# Altium PCB UmbilicalBoardV5.PcbDoc
Units mm, origin at the board's own origin, x right, y up, seen from the top; angles counter-clockwise.
Board outline 88.77 x 92.99 mm, 4 copper layers (Top Layer, GndPlane, PowerPlane, Bottom Layer), stack 0.107 mm thick; 60 components, 102 nets, 404 pads, 5 vias.
Unrouted connection lines stored in the file: 136.
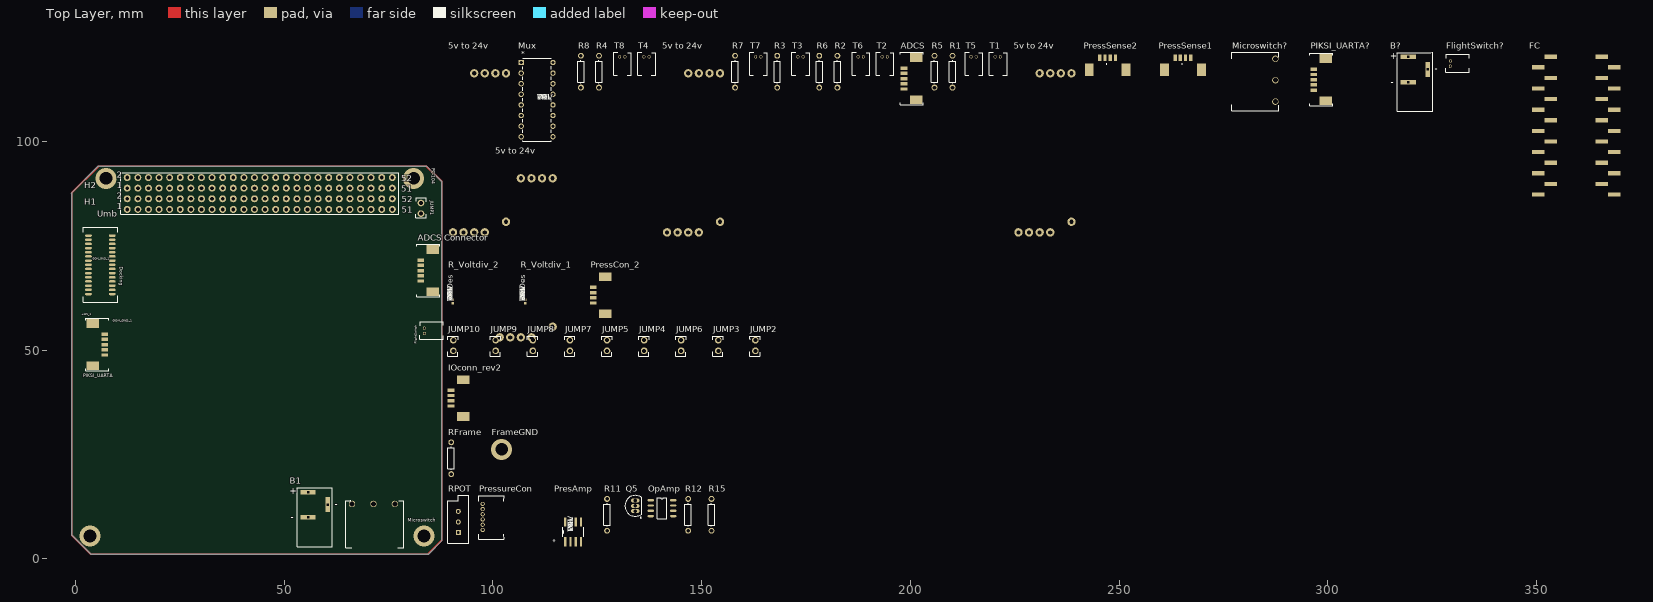
[diagram p0: Top Layer view]
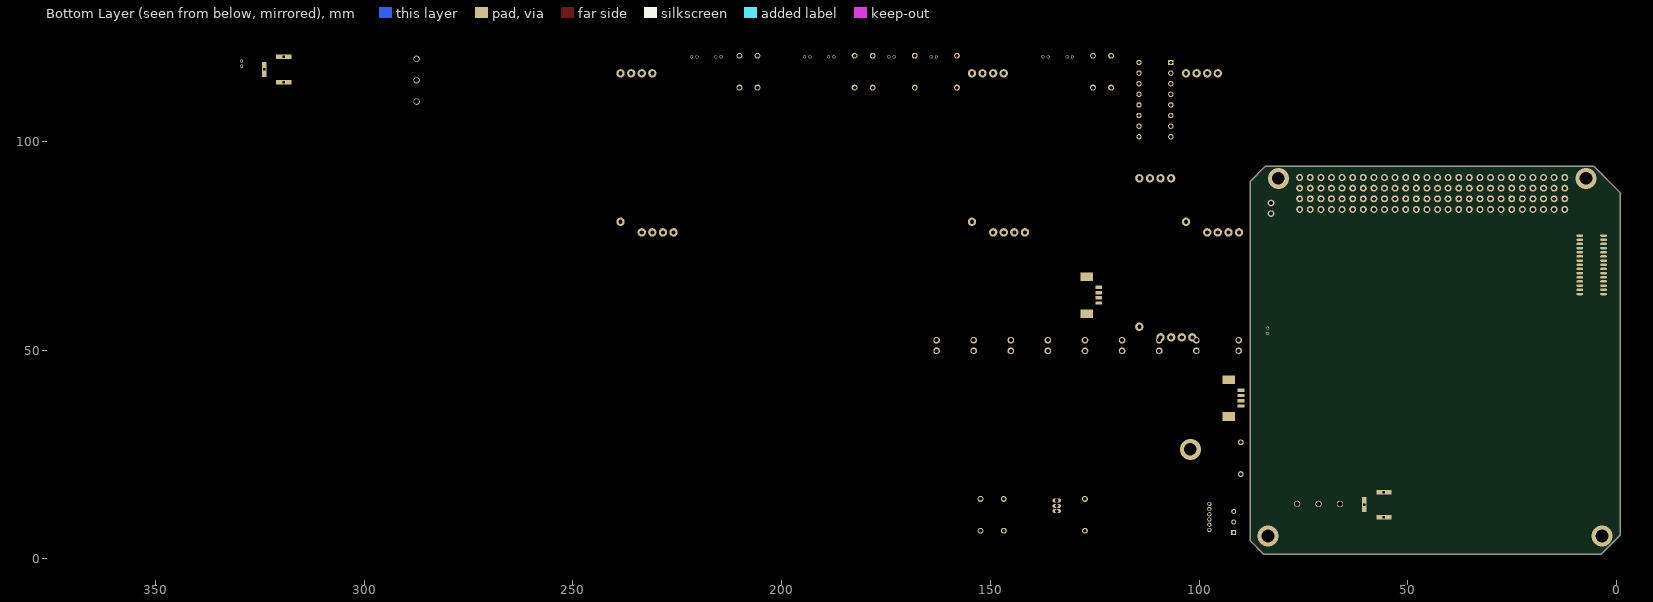
[diagram p1: Bottom Layer view, seen from below]
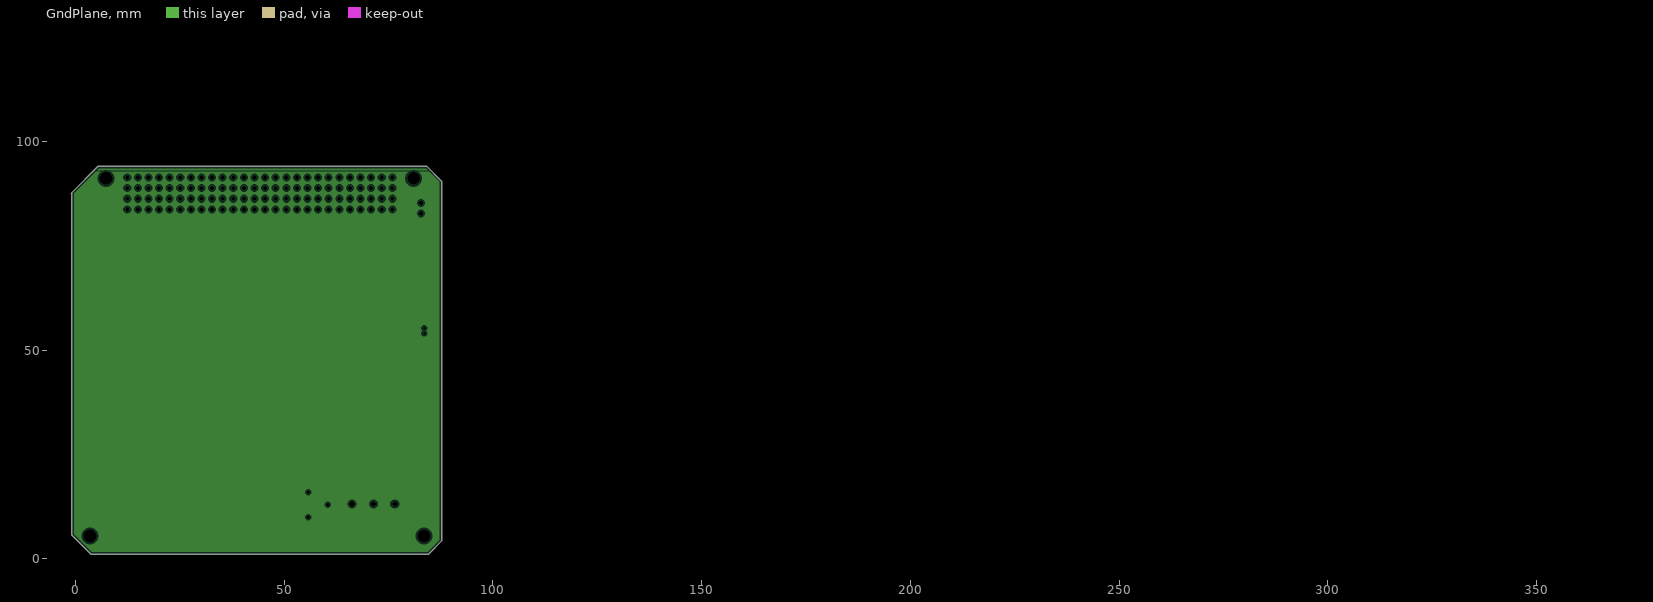
[diagram p2: GndPlane, clearances drawn from the general rule]
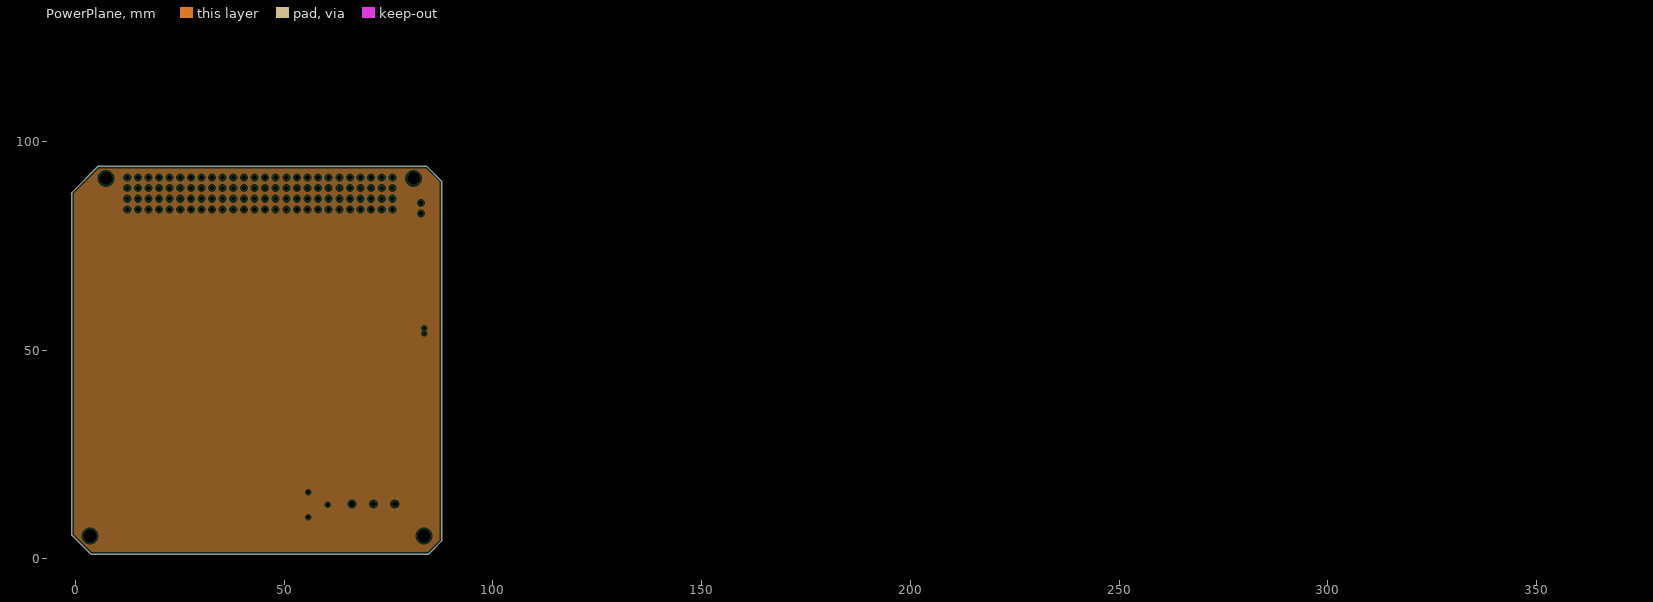
[diagram p3: PowerPlane, clearances drawn from the general rule]

## Layer stack, top to bottom
Top Solder: solder mask 0.0102, Solder Resist, Dk 3.5
Top Layer: signal copper 0.0356
GndPlane: plane copper 0.0178
PowerPlane: plane copper 0.0178, net +12V_1_JUMP7
Bottom Layer: signal copper 0.0356
Bottom Solder: solder mask 0.0102, Solder Resist, Dk 3.5

## Board outline
84.099,94.132 87.782,90.449 87.782,4.42 87.808,4.394 84.633,1.219 84.633,1.143 3.708,1.143 -0.889,5.74 -0.889,87.579 -0.965,87.655 5.436,94.056 84.099,94.056

## Design rules (kind name [scope] priority, off if disabled: settings)
Clearance [All] p1: gap=0.254 ignorepadtopadclearanceinfootprint=FALSE except(0: Arc-Hole Track-Hole SMDPad-Hole THPad-Hole Via-Hole Fill-Hole Poly-Hole Region-Hole Text-Hole; 0.127: Track-Track Track-SMDPad Track-THPad SMDPad-SMDPad SMDPad-THPad THPad-THPad)
HoleSize [All] p1: absolutevalues=TRUE maxlimit=3.048 minlimit=0.025 maxpercent=80.000 minpercent=20.000
MinimumSolderMaskSliver [All] p1: minsoldermaskwidth=0.127
PlaneClearance [All] p1: clearance=0.508
PlaneConnect [All] p1: planeconnectstyle=Direct reliefexpansion=0.508 reliefentries=4 reliefconductorwidth=0.254 reliefairgap=0.254
PolygonConnect [All] p1: connectstyle=Direct reliefconductorwidth=0.254 reliefentries=4 polygonreliefangle="90 Angle" airgapwidth=0.254
RoomDefinition U_GroundtoFrame [InComponentClass('U_GroundtoFrame')] p1: confinementstyle=ConfineIn formatcopy=TRUE lockcomponents=FALSE outline 88.951,19.253 111.836,19.253 111.836,31.547 88.951,31.547
RoomDefinition "U_24V Step Up Voltage Regulator U3V50F24" [InComponentClass('U_24V Step Up Voltage Regulator U3V50F24')] p2: confinementstyle=ConfineIn formatcopy=TRUE lockcomponents=FALSE outline 88.951,72.949 240.106,72.949 240.106,124.155 88.951,124.155
RoomDefinition PressureSensor [InComponentClass('PressureSensor')] p3: confinementstyle=ConfineIn formatcopy=TRUE lockcomponents=FALSE outline 88.951,2.565 155.905,2.565 155.905,17.983 88.951,17.983
RoomDefinition U_ADCS [InComponentClass('U_ADCS')] p4: confinementstyle=ConfineIn formatcopy=TRUE lockcomponents=FALSE outline 81.28,62.128 87.859,62.128 87.859,76.098 81.28,76.098
RoutingVias [All] p1: holewidth=0.711 width=1.27 viastyle="Through Hole" minholewidth=0.711 minwidth=1.27 maxholewidth=0.711 maxwidth=1.27
SilkToSolderMaskClearance [IsPad] p1: minsilkscreentomaskgap=0.05 clearancetoexposedcopper=TRUE
SolderMaskExpansion [All] p1: expansion=0.102
Width [All] p1: maxlimit=0.559 minlimit=0.305 preferedwidth=0.33
25 further rules are at their usual default settings.

## Classes and differential pairs
component class PressureSensor: OpAmp PresAmp PressureCon Q5 R11 R12 R15 RPOT
component class U_IOconnector: IOconn_rev2
component class Docking: Docking
component class Switch: FlightSwitch Microswitch
component class Umbilical104: "5v to 24v" ADCS B? FC FlightSwitch? Microswitch? Mux PC-104 PIKSI_UARTA? PressSense1 PressSense2 R1 R2 R3 R4 R5 R6 R7 R8 T1 T2 T3 T4 T5 T6 T7 T8
component class U_Jumpers_rev2: JUMP1 JUMP2 JUMP3 JUMP4 JUMP5 JUMP6 JUMP7 JUMP8 JUMP9 JUMP10
component class U_PressureConnector_2: PressCon_2 R_Voltdiv_1 R_Voltdiv_2
component class "Barrel Jack": B1
component class "U_24V Step Up Voltage Regulator U3V50F24": "5v to 24v"
component class U_ADCS: "ADCS Connector"
component class U_GroundtoFrame: FrameGND RFrame
component class PIKSI_UARTA: PIKSI_UARTA

## Components (designator, comment, footprint, x,y, rotation, side; value= is the part's Value field where it differs from the comment)
"5v to 24v" "U3V50F24, 24V Step Up Regulator, Pololu" U3V50F24 225.907,78.232 r90 top
"5v to 24v" "U3V50F24, 24V Step Up Regulator, Pololu" U3V50F24 141.732,78.232 r90 top
"5v to 24v" "U3V50F24, 24V Step Up Regulator, Pololu" U3V50F24 90.449,78.232 r90 top
"5v to 24v" "U3V50F24, 24V Step Up Regulator, Pololu" U3V50F24 101.625,53.086 r90 top
ADCS "ADCS" "Molex Picoblade 5 Pin" 202.895,108.966 r90 top
"ADCS Connector" "PIKSI_UART Connector" "Molex Picoblade 5 Pin" 87.128,62.968 r90 top
B1 "Barrel_Jack" Barrel_Jack 55.753,9.957 r0 top
B? "Barrel_Jack" Barrel_Jack 319.278,114.224 r0 top
Docking "Docking_Molex_30Pin" DOCKING_MOLEX_30PIN 3.124,77.47 r270 top
FC "Teensy 3.2 Headers" "Teensy 3.2 SMD Headers" 350.418,120.32 r0 top
FlightSwitch "RemoverBeforeFlightSwitch" "REMOVERBEFOREFLIGHT SWITCH" 83.591,52.07 r90 top
FlightSwitch? "RemoverBeforeFlightSwitch" "RemoverBeforeFlight Switch" 329.362,116.078 r90 top
FrameGND "ViatoFrame" ViatoFrame 102.108,26.263 r90 top
IOconn_rev2 "IOconn_rev2" IOConn_Rev2 89.992,36.652 r90 top
JUMP1 "Jumper(DIP2)" JUMPER(DIP2) 82.779,85.268 r270 top
JUMP2 "Jumper(DIP2)" Jumper(DIP2) 162.89,49.86 r90 top
JUMP3 "Jumper(DIP2)" Jumper(DIP2) 154,49.86 r90 top
JUMP4 "Jumper(DIP2)" Jumper(DIP2) 136.245,49.86 r90 top
JUMP5 "Jumper(DIP2)" Jumper(DIP2) 127.355,49.86 r90 top
JUMP6 "Jumper(DIP2)" Jumper(DIP2) 145.11,49.86 r90 top
JUMP7 "Jumper(DIP2)" Jumper(DIP2) 118.465,49.86 r90 top
JUMP8 "Jumper(DIP2)" Jumper(DIP2) 109.575,49.86 r90 top
JUMP9 "Jumper(DIP2)" Jumper(DIP2) 100.685,49.86 r90 top
JUMP10 "Jumper(DIP2)" Jumper(DIP2) 90.525,49.86 r90 top
Microswitch "MicroSwitch" MICROSWITCH_3PIN 71.45,13.233 r180 top locked
Microswitch? "MicroSwitch" MicroSwitch_3pin 287.502,114.63 r90 top
Mux "CD74HC4051E" N16 114.401,101.143 r0 top value=Value
OpAmp "UA741" UA741 137.82,14.071 r0 top
PC-104 "PC-104" PC-104FOOTPRINT 12.421,83.744 r0 top locked
PIKSI_UARTA "PIKSI_UART Connector" "MOLEX PICOBLADE 5 PIN" 2.642,57.455 r270 top
PIKSI_UARTA? "PIKSI_UART Connector" "Molex Picoblade 5 Pin" 301.015,108.712 r90 top
PresAmp "AD627ARZ" R_8 119.227,6.477 r90 top value=Value
PressCon_2 "PressureConn_2" PressCon_2 124.714,60.63 r90 top
PressSense1 "Connector 4POS Molex PicoBlade" 532610471 267.182,120.066 r90 top
PressSense2 "Connector 4POS Molex PicoBlade" 532610471 249.148,120.066 r90 top
PressureCon "PressureConnector" "Pressure Connector" 96.367,9.83 r90 top
Q5 "2N3906" TO-92A 134.112,12.725 r0 top
R1 "Resistor" AXIAL-0.3 210.109,116.738 r90 top value=1K
R2 "Resistor" AXIAL-0.3 182.55,116.738 r90 top value=1K
R3 "Resistor" AXIAL-0.3 168.122,116.738 r90 top value=1K
R4 "Resistor" AXIAL-0.3 125.425,116.738 r90 top value=1K
R5 "Resistor" AXIAL-0.3 205.791,116.738 r90 top value=1K
R6 "Resistor" AXIAL-0.3 178.206,116.738 r90 top value=1K
R7 "Resistor" AXIAL-0.3 158.013,116.738 r90 top value=1K
R8 "Resistor" AXIAL-0.3 121.107,116.738 r90 top value=1K
R11 "1000" AXIAL-0.3 127.355,10.566 r90 top value=Res
R12 "1000" AXIAL-0.3 146.786,10.566 r90 top value=Res
R15 "1000" AXIAL-0.3 152.374,10.566 r90 top value=Res
R_Voltdiv_1 "3K" 0402 107.721,61.696 r90 top value=3000
R_Voltdiv_2 "1090" 0402 90.424,61.696 r90 top
RFrame "Rframe" AXIAL-0.3 90.017,24.13 r90 top value=1M
RPOT "100K" VR5 91.719,8.864 r90 top value=1K
T1 "TempSensor1" "RemoverBeforeFlight Switch" 218.389,120.294 r0 top
T2 "TempSensor2" "RemoverBeforeFlight Switch" 191.313,120.294 r0 top
T3 "TempSensor3" "RemoverBeforeFlight Switch" 171.12,120.294 r0 top
T4 "TempSensor4" "RemoverBeforeFlight Switch" 134.213,120.294 r0 top
T5 "TempSensor5" "RemoverBeforeFlight Switch" 212.598,120.294 r0 top
T6 "TempSensor6" "RemoverBeforeFlight Switch" 185.547,120.294 r0 top
T7 "TempSensor7" "RemoverBeforeFlight Switch" 161.01,120.294 r0 top
T8 "TempSensor8" "RemoverBeforeFlight Switch" 128.422,120.294 r0 top

## Footprints (in the part's own frame and the unit in brackets; to place one, negate y for a bottom-side part, rotate by r counter-clockwise, add the part's x,y. Pads: shape width x height; smd on the part's side, far side on the other; paste and mask are expansions set on the pad)
0402 [mil]
  rect 22x24 smd: 1(-16.5,0) 2(16.5,0)
532610471 [mm] "Connector 4POS Molex PicoBlade"
  rect 1.6x0.8 smd: 1(0,3.75) 2(0,2.5) 3(0,1.25) 4(0,0)
  rect 3x2.1 smd: ""(-2.9,6.3) ""(-2.9,-2.55)
  silkscreen extent -1.52,2.07 -1.42,2.17, body extent -4.71,-3.81 1.02,7.56, height 0.6
AXIAL-0.3 [mm] "Axial Device, Thru-Hole; 2 Leads; 0.3 in Pin Spacing"
  round 1.4 hole 0.85: 1(-3.81,0) 2(3.81,0)
  silkscreen extent -2.77,-0.76 2.77,0.76
Barrel_Jack [mm] "KLDX-0202-B"
  rect 3.6x1.1 hole 0.5 square: 0(0,0) 2(0,6.05)
  rect 1.1x3.6 hole 0.5 square: 1(4.7,3.05)
  silkscreen extent -2.65,-7 5.82,7.12
DOCKING_MOLEX_30PIN [mm] "501571-3007"
  oval 0.6x1.6 smd: A1(0,0) A2(1,0) A3(2,0) A4(3,0) A5(4,0) A6(5,0) A7(6,0) A8(7,0) A9(8,0) A10(9,0) A11(10,0) A12(11,0) A13(12,0) A14(13,0) A15(14,0) A16(0,5.7) A17(1,5.7) A18(2,5.7) A19(3,5.7) A20(4,5.7) A21(5,5.7) A22(6,5.7) A23(7,5.7) A24(8,5.7) A25(9,5.7) A26(10,5.7) A27(11,5.7) A28(12,5.7) A29(13,5.7) A30(14,5.7)
  oval 0.6x1.6 smd far side: B1(0,0) B2(1,0) B3(2,0) B4(3,0) B5(4,0) B6(5,0) B7(6,0) B8(7,0) B9(8,0) B10(9,0) B11(10,0) B12(11,0) B13(12,0) B14(13,0) B15(14,0) B16(0,5.7) B17(1,5.7) B18(2,5.7) B19(3,5.7) B20(4,5.7) B21(5,5.7) B22(6,5.7) B23(7,5.7) B24(8,5.7) B25(9,5.7) B26(10,5.7) B27(11,5.7) B28(12,5.7) B29(13,5.7) B30(14,5.7)
  silkscreen extent -1.97,-1.3 16.02,7.02, body extent -1.97,-1.27 16.02,6.98, height 2.95
IOConn_Rev2 [mm] "Molex 4 Pin Picoblade. Part # 53261-0471"
  rect 0.8x1.6 all layers, no hole: 1(0,0) 2(1.25,0) 3(2.5,0) 4(3.75,0)
  rect 2.1x3 all layers, no hole: 5(-2.55,-2.9) 6(6.3,-2.9)
  body extent -3.22,-4.47 6.93,0.73, height 1.7
JUMPER(DIP2) [mm] "S1012E-02-ND (Pin), 3M9580-ND (Jumper)"
  round 1.6 hole 0.95: 1(0,0) 2(2.54,0)
  silkscreen extent -1.3,-1.2 3.55,1.3
Jumper(DIP2) [mm] "S1012E-02-ND (Pin), 3M9580-ND (Jumper)"
  round 1.6 hole 0.95: 1(0,0) 2(2.54,0)
  silkscreen extent -1.3,-1.2 3.55,1.3
MICROSWITCH_3PIN [mm] "Omron Electronics Inc-EMC Div D2FS-FL-N-A1"
  round 1.524 hole 1.2: 1(-5.08,0.05) 2(0.05,0.05) 3(5.18,0.05)
  silkscreen extent -7.25,-0.77 6.73,10.55, body extent -7.25,-0.75 6.73,10.55
MicroSwitch_3pin [mm] "Omron Electronics Inc-EMC Div D2FS-FL-N-A1"
  round 1.524 hole 1.2: 1(-5.08,0.05) 2(0.05,0.05) 3(5.18,0.05)
  silkscreen extent -7.25,-0.77 6.73,10.55, body extent -7.25,-0.75 6.73,10.55
"Molex Picoblade 5 Pin" [mm] "Molex Picoblade Header, SMT, Right Angle  53261-0571"
  rect 0.8x1.6 smd: 0(3.6,4.4) 1(4.85,4.4) 2(6.1,4.4) 3(7.35,4.4) 4(8.6,4.4)
  rect 2.1x3 smd: 5(1.05,1.5) 6(11.15,1.5)
  silkscreen extent -0.2,-0.2 12.4,5.3, body extent 0.4,0 11.8,5.2, height 3.4
"MOLEX PICOBLADE 5 PIN" [mm] "Molex Picoblade Header, SMT, Right Angle  53261-0571"
  rect 0.8x1.6 smd: 0(3.6,4.4) 1(4.85,4.4) 2(6.1,4.4) 3(7.35,4.4) 4(8.6,4.4)
  rect 2.1x3 smd: 5(1.05,1.5) 6(11.15,1.5)
  silkscreen extent -0.2,-0.2 12.4,5.3, body extent 0.4,0 11.8,5.2, height 3.4
N16 [mil]
  rect 51x51 / inner round 60 / far side rect 51x51 hole 31: 1(-300,700)
  round 51 / inner round 60 / far side round 51 hole 31: 2(-300,600) 3(-300,500) 4(-300,400) 5(-300,300) 6(-300,200) 7(-300,100) 8(-300,0) 9(0,0) 10(0,100) 11(0,200) 12(0,300) 13(0,400) 14(0,500) 15(0,600) 16(0,700)
  silkscreen extent -285,-42 -15,742, body extent 0,0 10,10, height 10
PC-104FOOTPRINT [mm]
  round 1.676 hole 0.914 mask+0.076: H1_1(0,0) H1_2(0,2.54) H1_3(2.54,0) H1_4(2.54,2.54) H1_5(5.08,0) H1_6(5.08,2.54) H1_7(7.62,0) H1_8(7.62,2.54) H1_9(10.16,0) H1_10(10.16,2.54) H1_11(12.7,0) H1_12(12.7,2.54) H1_13(15.24,0) H1_14(15.24,2.54) H1_15(17.78,0) H1_16(17.78,2.54) H1_17(20.32,0) H1_18(20.32,2.54) H1_19(22.86,0) H1_20(22.86,2.54) H1_21(25.4,0) H1_22(25.4,2.54) H1_23(27.94,0) H1_24(27.94,2.54) H1_25(30.48,0) H1_26(30.48,2.54) H1_27(33.02,0) H1_28(33.02,2.54) H1_29(35.56,0) H1_30(35.56,2.54) H1_31(38.1,0) H1_32(38.1,2.54) H1_33(40.64,0) H1_34(40.64,2.54) H1_35(43.18,0) H1_36(43.18,2.54) H1_37(45.72,0) H1_38(45.72,2.54) H1_39(48.26,0) H1_40(48.26,2.54) H1_41(50.8,0) H1_42(50.8,2.54) H1_43(53.34,0) H1_44(53.34,2.54) H1_45(55.88,0) H1_46(55.88,2.54) H1_47(58.42,0) H1_48(58.42,2.54) H1_49(60.96,0) H1_50(60.96,2.54) H1_51(63.5,0) H1_52(63.5,2.54) H2_1(0,5.08) H2_2(0,7.62) H2_3(2.54,5.08) H2_4(2.54,7.62) H2_5(5.08,5.08) H2_6(5.08,7.62) H2_7(7.62,5.08) H2_8(7.62,7.62) H2_9(10.16,5.08) H2_10(10.16,7.62) H2_11(12.7,5.08) H2_12(12.7,7.62) H2_13(15.24,5.08) H2_14(15.24,7.62) H2_15(17.78,5.08) H2_16(17.78,7.62) H2_17(20.32,5.08) H2_18(20.32,7.62) H2_19(22.86,5.08) H2_20(22.86,7.62) H2_21(25.4,5.08) H2_22(25.4,7.62) H2_23(27.94,5.08) H2_24(27.94,7.62) H2_25(30.48,5.08) H2_26(30.48,7.62) H2_27(33.02,5.08) H2_28(33.02,7.62) H2_29(35.56,5.08) H2_30(35.56,7.62) H2_31(38.1,5.08) H2_32(38.1,7.62) H2_33(40.64,5.08) H2_34(40.64,7.62) H2_35(43.18,5.08) H2_36(43.18,7.62) H2_37(45.72,5.08) H2_38(45.72,7.62) H2_39(48.26,5.08) H2_40(48.26,7.62) H2_41(50.8,5.08) H2_42(50.8,7.62) H2_43(53.34,5.08) H2_44(53.34,7.62) H2_45(55.88,5.08) H2_46(55.88,7.62) H2_47(58.42,5.08) H2_48(58.42,7.62) H2_49(60.96,5.08) H2_50(60.96,7.62) H2_51(63.5,5.08) H2_52(63.5,7.62)
  silkscreen extent -1.5,-1.19 65,8.81
PressCon_2 [mm] "Molex Picoblade 4 pin (for the second pressure conn) Part # 53261-0471"
  rect 0.8x1.6 all layers, no hole: 1(0.675,0.65) 2(1.925,0.65) 3(3.175,0.65) 4(4.425,0.65)
  rect 2.1x3 all layers, no hole: 5(-1.875,-2.25) 6(6.975,-2.25)
  body extent -2.55,-3.82 7.6,1.38, height 1.7
"Pressure Connector" [mm] "53048-0610"
  round 1 hole 0.6 mask+0.076: 1(-2.875,-1.2) 2(-1.625,-1.2) 3(-0.375,-1.2) 4(0.875,-1.2) 5(2.125,-1.2) 6(3.375,-1.2)
  silkscreen extent -5.07,-6.32 5.35,-0.23, body extent -4.45,-6.08 4.8,-0.58, height 1.75
R_8 [mil]
  rect 86x22 smd: 1(-93,75) 2(-93,25) 3(-93,-25) 4(-93,-75) 5(93,-75) 6(93,-25) 7(93,25) 8(93,75)
  silkscreen extent -46,-98 46,98
"REMOVERBEFOREFLIGHT SWITCH" [mm] "Molex Picoblade Part Number: 53048-0210"
  round 0.75 hole 0.5: 1(1.95,0) 2(3.205,0)
  silkscreen extent 0.53,-4.5 4.78,1.05, body extent 0.53,-4.47 4.78,1.03, height 4.05
"RemoverBeforeFlight Switch" [mm] "Molex Picoblade Part Number: 53048-0210"
  round 0.75 hole 0.5: 1(1.95,0) 2(3.205,0)
  silkscreen extent 0.53,-4.5 4.78,1.05, body extent 0.53,-4.47 4.78,1.03, height 4.05
"Teensy 3.2 SMD Headers" [mm]
  rect 3x1 smd: 1(3,0) 2(0,-2.54) 3(3,-5.08) 4(0,-7.62) 5(3,-10.16) 6(0,-12.7) 7(3,-15.24) 8(0,-17.78) 9(3,-20.32) 10(0,-22.86) 11(3,-25.4) 12(0,-27.94) 13(3,-30.48) 14(0,-33.02) 20(18.24,-33.02) 21(15.24,-30.48) 22(18.24,-27.94) 23(15.24,-25.4) 24(18.24,-22.86) 25(15.24,-20.32) 26(18.24,-17.78) 27(15.24,-15.24) 28(18.24,-12.7) 29(15.24,-10.16) 30(18.24,-7.62) 31(15.24,-5.08) 32(18.24,-2.54) 33(15.24,0)
  body extent -1.09,-34.49 19.35,1.16, height 0.25
TO-92A [mm] "TO, Flat Index; 3 In-Line, Axial Leads; Body Dia. 4.5mm; Leads 0.51 x 0.48 mm (max)"
  oval 2x1 hole 0.9: 1(0,-1.27) 2(0,0) 3(0,1.27)
  silkscreen extent -2.48,-2.95 1.5,2.48, body extent -2.48,-2.5 1.5,2.5, height 6.86
U3V50F24 [mm]
  round 2 hole 1: 1(0,0) 2(0,-2.54) 3(0,-5.08) 4(0,-7.62) 5(2.54,-12.7) 6(38.1,-12.7) 7(38.1,-10.16) 8(38.1,-7.62) 9(38.1,-5.08)
  body extent -4.72,-14 42.7,1.27, height 0.25
UA741 [mm]
  oval 1.5x0.55 smd: 1(0,0) 2(0,-1.27) 3(0,-2.54) 4(0,-3.81) 5(5.4,-3.81) 6(5.4,-2.54) 7(5.4,-1.27) 8(5.4,0)
  silkscreen extent 1.58,-4.44 3.82,0.64
ViatoFrame [mm]
VR5 [mm] "Thru-Hole; 3 Leads"
  rect 1.2x1.2 hole 0.7: 1(-2.54,0)
  round 1.2 hole 0.7: 2(0,0) 3(2.54,0)
  silkscreen extent -5.08,-2.54 6.35,2.54

## Part data
"5v to 24v" "5v to 24v" "5v to 24v" "5v to 24v": "4V Step Up Regulator"
ADCS: library part "PIKSI_UART Connector", "Molex Picoblade 53261-0571"
"ADCS Connector" PIKSI_UARTA PIKSI_UARTA?: "Molex Picoblade 53261-0571"
Docking: "24 Pin Connector"
FlightSwitch FlightSwitch?: "53048-0210 Molex Picoblade"
IOconn_rev2: "Part Number: 53261-0471"
Microswitch Microswitch?: "Omron Electronics Inc-EMC Div D2FS-FL-N-A1"
Mux: "Imported", Manufacturer_Name="Texas Instruments", C="Copyright (C) 2015 Accelerated Designs. All rights reserved", Copyright="Copyright (C) 2015 Accelerated Designs. All rights reserved", Family=Unknown, Manufacturer_Part_Number=CD74HC4051E, RefDes=RefDes, RS_Part_Number=526694, Section=Unknown, Type=Type, Vendor="Texas Instruments"
PC-104: "ESQ-126-14-G-D (2 total needed)"
PresAmp: "Imported", Manufacturer_Part_Number=AD627ARZ, RefDes=Refdes, Type=Type, Vendor=Vendor
PressSense1 PressSense2: library part 532610471
PressureCon: "Molex 53261-0671"
Q5: "PNP General Purpose Amplifier", ComponentLink1Description="Manufacturer Link", ComponentLink1URL=http://www.fairchildsemi.com/, ComponentLink2Description=Datasheet, ComponentLink2URL=http://www.fairchildsemi.com/ds/2N%2F2N3906.pdf, DatasheetVersion=1997, LatestRevisionDate=15-Jan-2003, LatestRevisionNote="PCB Footprint 'BCY-W3/D4.7' replaced", PackageDescription="TO, Flat Index; 3 In-Line, Axial Leads; Body Dia. 4.5mm; Leads 0.51 x 0.48 mm (max)", PackageReference=TO-92A, PackageVersion=Sep-1998, Published=8-Jun-2000, Publisher="Altium Limited"
R1 R2 R3 R4 R5 R6 R7 R8: library part Res1, LatestRevisionDate=17-Jul-2002, LatestRevisionNote="Re-released for DXP Platform.", PackageDescription="Axial Device, Thru-Hole; 2 Leads; 0.3 in Pin Spacing", PackageReference=AXIAL-0.3, Published=8-Jun-2000, Publisher="Altium Limited"
R11 R12 R15: library part Res1, "Resistor- 696-1552-ND", LatestRevisionDate=17-Jul-2002, LatestRevisionNote="Re-released for DXP Platform.", PackageDescription="Axial Device, Thru-Hole; 2 Leads; 0.3 in Pin Spacing", PackageReference=AXIAL-0.3, Published=8-Jun-2000, Publisher="Altium Limited"
R_Voltdiv_1 R_Voltdiv_2: library part CRCW040210R0FKED, "Imported", Manufacturer_Name=Vishay-Dale, Manufacturer_Part_Number=CRCW040210R0FKED, RefDes=RefDes, Type=TYPE, Vendor=Vishay-Dale
RFrame: library part Res1, "Resistor -  CF14JT1M00CT-ND", LatestRevisionDate=17-Jul-2002, LatestRevisionNote="Re-released for DXP Platform.", PackageDescription="Axial Device, Thru-Hole; 2 Leads; 0.3 in Pin Spacing", PackageReference=AXIAL-0.3, Published=8-Jun-2000, Publisher="Altium Limited"
RPOT: library part RPot, "Potentiometer", LatestRevisionDate=17-Jul-2002, LatestRevisionNote="Re-released for DXP Platform.", PackageDescription="Variable Resistor, Thru-Hole; 3 Leads", PackageReference=VR5, Published=8-Jun-2000, Publisher="Altium Limited", Set Position=0.5, Sim Note="Enter the Resistance value and the set point into parameter fields."
T1 T2 T3 T4 T5 T6 T7 T8: library part RemoverBeforeFlightSwitch, "53048-0210 Molex Picoblade"

## Via types
v1: diameter 5, hole 3.048, Top Layer to Bottom Layer, 5 vias

## Nets (pads, with @x,y where several pads share a name; then routed paths per layer and width w, separated by ;. In a path a pad name is that pad's centre, name@x,y a point inside that pad or via, vN(x,y) a via of type N, cw(c..) or ccw(c..) an arc to the next point about the centre after c; other vN are vias at no path point)
3.3_Valves135: PC-104.H2_28
3.3_Valves246: PC-104.H2_26
3V3_1: IOconn_rev2.4
3V3_2: JUMP4.1
3V3_2_JUMP4: JUMP4.2 PresAmp.7 R12.1 R15.1
5_ADCS: ADCS.4 PC-104.H1_50
5_mux: Mux.16 PC-104.H1_51
5_Valves135: PC-104.H1_48
5_Valves246: PC-104.H1_49
5V_3: "5v to 24v.3"@106.705,53.086 "5v to 24v.4"@109.245,53.086 "ADCS Connector.4"
5V_BattChargeIn: B?.2 PC-104.H1_32
5V_Teensy1: FC.33 PC-104.H2_25
5V_Teensy2: PC-104.H2_27
5V_TempSensors: PC-104.H1_47 R1.1 R2.1 R3.1 R4.1 R5.1 R6.1 R7.1 R8.1
24V: ADCS.1
24V_enable: FC.4 PC-104.H1_21
+5V_1: JUMP1.1
+5V_1_JUMP1: JUMP1.2
+5V_2: JUMP2.1
+5V_2_JUMP2: Docking.A8 Docking.A9 JUMP2.2
+5V_3: JUMP3.1
+5V_3_JUMP3: JUMP3.2 PIKSI_UARTA.5
+5V_5: JUMP6.1
+5V_5_JUMP6: JUMP6.2 PressCon_2.4
+12V_1: JUMP7.1 JUMP8.1 JUMP9.1 JUMP10.1
+12V_1_JUMP7: JUMP7.2
+12V_1_JUMP8: JUMP8.2
+12V_1_JUMP9: Docking.A4 Docking.A5 JUMP9.2
+12V_1_JUMP10: JUMP10.2
AGND: FC.32 PC-104.H2_31
ANALOGGND: OpAmp.4 PresAmp.4 PresAmp.5 PressureCon.2 R11.2
BAT_CHARGE: B1.2
DGND: ADCS.5 B?.0 B?.1 FC.1 FlightSwitch?.1 Microswitch?.3 Mux.8 PC-104.H2_29 PIKSI_UARTA?.1 T1.2 T2.2 T3.2 T4.2 T5.2 T6.2 T7.2 T8.2
Docking_BW: FC.6 PC-104.H1_25
Docking_en: FC.7 PC-104.H1_27
DockingFW: FC.5 PC-104.H1_23
EPS_SCL: FC.30 PC-104.H1_43
EPS_SDA: FC.29 PC-104.H1_41
GND: RPOT.1
GOM_GND_1: "5v to 24v.1"@101.625,53.086 "5v to 24v.2"@104.165,53.086 "5v to 24v.5"@114.325,55.626 "5v to 24v.8"@109.245,91.186 "5v to 24v.9"@106.705,91.186 "ADCS Connector.3" B1.0 B1.1 Docking.A6 Docking.A7 Docking.A10 Docking.A11 Docking.A12 Docking.A13 Docking.A18 FlightSwitch.1 IOconn_rev2.3 Microswitch.3 PIKSI_UARTA.1 PressCon_2.1 R_Voltdiv_1.1 RFrame.1
GPIO3: Docking.A3
GPIO_ADC_NEWPRESS: R_Voltdiv_1.2 R_Voltdiv_2.2
GPIO_ADC_OLDPRESS: PresAmp.6
Linkstar_RX: FC.9 PC-104.H1_15
Linkstar_TX: FC.10 PC-104.H1_13
mux1: Mux.13 R5.2 T5.1
mux2: Mux.14 R6.2 T6.1
mux3: Mux.15 R7.2 T7.1
mux4: Mux.12 R8.2 T8.1
mux5: Mux.1 R1.2 T1.1
mux6: Mux.5 R2.2 T2.1
mux7: Mux.2 R3.2 T3.1
mux8: Mux.4 R4.2 T4.1
"Net5v to 24v_1": "5v to 24v.1"@90.449,78.232 "5v to 24v.2"@92.989,78.232 "5v to 24v.8"@98.069,116.332 "5v to 24v.9"@95.529,116.332
"Net5v to 24v_3": "5v to 24v.3"@95.529,78.232 "5v to 24v.4"@98.069,78.232
"Net5v to 24v_6": "5v to 24v.6"@103.149,116.332 "5v to 24v.7"@100.609,116.332
NetDocking_0: Docking.A1
NetDocking_1: Docking.A2
NetDocking_15: Docking.A16
NetDocking_16: Docking.A17
NetDocking_22: Docking.A23
NetDocking_23: Docking.A24
NetFlightSwitch?_2: FlightSwitch?.2 Microswitch?.2
NetFlightSwitch_2: FlightSwitch.2 Microswitch.2
NetFrameGND_1: RFrame.2
NetIOconn_rev2_1: IOconn_rev2.1
NetIOconn_rev2_2: IOconn_rev2.2
NetOpAmp_2: OpAmp.2 Q5.1 R15.2
NetOpAmp_3: OpAmp.3 R11.1 R12.2
NetOpAmp_6: OpAmp.6 Q5.2
NetPresAmp_1: PresAmp.1 RPOT.2
NetPresAmp_2: PresAmp.2 PressureCon.4
NetPresAmp_3: PresAmp.3 PressureCon.1
NetPresAmp_8: PresAmp.8 RPOT.3
NetPressCon_2_2: PressCon_2.2 R_Voltdiv_2.1
NetPressureCon_3: PressureCon.3 Q5.3
Piksi_RX: FC.2 PC-104.H1_19 PIKSI_UARTA?.2
Piksi_TX: FC.3 PC-104.H1_17 PIKSI_UARTA?.3
Pressure1: FC.26 PC-104.H1_33
Pressure2: FC.27 PC-104.H1_35
RX3: "ADCS Connector.1"
SPI_MISO: Docking.A19
SPI_MOSI: Docking.A20
SPI_SCK: Docking.A21
SPI_SS: Docking.A22
Teensy2_RX: ADCS.2 FC.11 PC-104.H1_31
Teensy2_TX: ADCS.3 FC.12 PC-104.H1_29
TempMux1: Mux.11 PC-104.H1_2
TempMux2: FC.13 Mux.10 PC-104.H1_4
TempMux3: FC.14 Mux.9 PC-104.H1_6
TempMuxRead: FC.28 Mux.3 PC-104.H1_8
TX3: "ADCS Connector.2"
UART5_RX: PIKSI_UARTA.2
UART5_TX: PIKSI_UARTA.3
V_BAT_1: JUMP5.1
V_BAT_1_JUMP5: Docking.A14 Docking.A15 JUMP5.2
Valve1: FC.20 PC-104.H1_1
Valve2: FC.21 PC-104.H1_3
Valve3: FC.22 PC-104.H1_5
Valve4: FC.23 PC-104.H1_7
Valve5: FC.24 PC-104.H1_9
Valve6: FC.25 PC-104.H1_11
pads on no net: "5v to 24v.1"@141.732,78.232 "5v to 24v.1"@225.907,78.232 "5v to 24v.2"@144.272,78.232 "5v to 24v.2"@228.447,78.232 "5v to 24v.3"@146.812,78.232 "5v to 24v.3"@230.987,78.232 "5v to 24v.4"@149.352,78.232 "5v to 24v.4"@233.527,78.232 "5v to 24v.5"@103.149,80.772 "5v to 24v.5"@154.432,80.772 "5v to 24v.5"@238.607,80.772 "5v to 24v.6"@114.325,91.186 "5v to 24v.6"@154.432,116.332 "5v to 24v.6"@238.607,116.332 "5v to 24v.7"@111.785,91.186 "5v to 24v.7"@151.892,116.332 "5v to 24v.7"@236.067,116.332 "5v to 24v.8"@149.352,116.332 "5v to 24v.8"@233.527,116.332 "5v to 24v.9"@146.812,116.332 "5v to 24v.9"@230.987,116.332 "ADCS Connector.0" "ADCS Connector.5" "ADCS Connector.6" ADCS.0 ADCS.6 Docking.A25 Docking.A26 Docking.A27 Docking.A28 Docking.A29 Docking.A30 Docking.B1 Docking.B2 Docking.B3 Docking.B4 Docking.B5 Docking.B6 Docking.B7 Docking.B8 Docking.B9 Docking.B10 Docking.B11 Docking.B12 Docking.B13 Docking.B14 Docking.B15 Docking.B16 Docking.B17 Docking.B18 Docking.B19 Docking.B20 Docking.B21 Docking.B22 Docking.B23 Docking.B24 Docking.B25 Docking.B26 Docking.B27 Docking.B28 Docking.B29 Docking.B30 FC.8 FC.31 IOconn_rev2.5 IOconn_rev2.6 Microswitch.1 Microswitch?.1 Mux.6 Mux.7 OpAmp.1 OpAmp.5 OpAmp.7 OpAmp.8 PC-104.H1_10 PC-104.H1_12 PC-104.H1_14 PC-104.H1_16 PC-104.H1_18 PC-104.H1_20 PC-104.H1_22 PC-104.H1_24 PC-104.H1_26 PC-104.H1_28 PC-104.H1_30 PC-104.H1_34 PC-104.H1_36 PC-104.H1_37 PC-104.H1_38 PC-104.H1_39 PC-104.H1_40 PC-104.H1_42 PC-104.H1_44 PC-104.H1_45 PC-104.H1_46 PC-104.H1_52 PC-104.H2_1 PC-104.H2_2 PC-104.H2_3 PC-104.H2_4 PC-104.H2_5 PC-104.H2_6 PC-104.H2_7 PC-104.H2_8 PC-104.H2_9 PC-104.H2_10 PC-104.H2_11 PC-104.H2_12 PC-104.H2_13 PC-104.H2_14 PC-104.H2_15 PC-104.H2_16 PC-104.H2_17 PC-104.H2_18 PC-104.H2_19 PC-104.H2_20 PC-104.H2_21 PC-104.H2_22 PC-104.H2_23 PC-104.H2_24 PC-104.H2_30 PC-104.H2_32 PC-104.H2_33 PC-104.H2_34 PC-104.H2_35 PC-104.H2_36 PC-104.H2_37 PC-104.H2_38 PC-104.H2_39 PC-104.H2_40 PC-104.H2_41 PC-104.H2_42 PC-104.H2_43 PC-104.H2_44 PC-104.H2_45 PC-104.H2_46 PC-104.H2_47 PC-104.H2_48 PC-104.H2_49 PC-104.H2_50 PC-104.H2_51 PC-104.H2_52 PIKSI_UARTA.0 PIKSI_UARTA.4 PIKSI_UARTA.6 PIKSI_UARTA?.0 PIKSI_UARTA?.4 PIKSI_UARTA?.5 PIKSI_UARTA?.6 PressCon_2.3 PressCon_2.5 PressCon_2.6 PressSense1. PressSense1.1 PressSense1.2 PressSense1.3 PressSense1.4 PressSense2. PressSense2.1 PressSense2.2 PressSense2.3 PressSense2.4 PressureCon.5 PressureCon.6
copper on no net: | length 352.7
  Top Layer w0.33: -0.889,5.715 3.658,1.168 84.43,1.168 87.681,4.42 87.759,4.497 87.759,17.888 87.732,17.915 87.732,90.449 84.049,94.132 5.588,94.132 -0.813,87.732 -0.813,5.664
  other v1: 3.526,5.479 83.526,5.479 102.108,26.263 7.326,91.179 81.026,91.179

## Polygon pours and split planes (outlines as drawn)
no net on GndPlane (split plane): 87.272,90.238 87.272,4.58 84.345,1.653 3.92,1.653 -0.379,5.952 -0.379,87.52 5.647,93.546 83.964,93.546
+12V_1_JUMP7 on PowerPlane (split plane): 87.272,90.238 87.272,4.58 84.345,1.653 3.92,1.653 -0.379,5.952 -0.379,87.52 5.647,93.546 83.964,93.546

## Other copper
GndPlane (plane layer: these items are gaps in the copper):
  lines w0: 4.978,93.04 86.919,93.04
  lines w0.254: 88.443,42.57 88.697,42.824

## Silkscreen, mask and mechanical layers (free items; w line width, h text height)
Top Overlay:
  rectangle: -26.518,15.773 -21.641,20.218
  text "GOM_GND_1" at 4.166,71.73 h0.38
  text "+12V_1" at 1.549,58.42 h0.38
  text "GOM_GND_1" at 8.992,56.769 h0.51
  text "Cornell  / Umbilical Board  / Rev 2.1" at -26.619,21.438 h1.52
Drill Drawing:
  text ".Legend" at 67.386,-4.216 h1.52

## Text inside footprints (layer, text, board x,y; h text height)
B1: Top Overlay "+" at 51.403,15.457 h1.52; Top Overlay "-" at 62.128,12.407 h1.52; Top Overlay "-" at 51.553,9.232 h1.52
B?: Top Overlay "+" at 314.928,119.724 h1.52; Top Overlay "-" at 325.653,116.674 h1.52; Top Overlay "-" at 315.078,113.499 h1.52
Mux: Top Overlay "TOL" at 110.591,110.033 h1.27; Top Overlay "VAL" at 110.591,110.033 h1.27; Top Overlay "DEV" at 110.591,110.033 h1.27; Top Overlay "PN" at 110.591,110.033 h1.27; Top Overlay "*" at 106.781,120.332 h1.27; Dimensions "RefDes2" at 110.591,110.033 h1.27; Dimensions "*" at 107.543,118.923 h1.27
PC-104: Mechanical 1 "J1" at 51.827,87.638 h0.76; Top Overlay "52" at 78.021,90.444 h1.52; Top Overlay "51" at 78.021,87.944 h1.52; Top Overlay "52" at 78.121,85.444 h1.52; Top Overlay "51" at 78.121,82.944 h1.52; Top Overlay "2" at 9.881,91.364 h1.52; Top Overlay "1" at 9.881,88.824 h1.52; Top Overlay "2" at 9.881,86.284 h1.52; Top Overlay "1" at 9.881,83.744 h1.52; Top Overlay "H2" at 2.134,88.773 h1.52; Top Overlay "H1" at 2.134,84.836 h1.52; Top Overlay "Umb" at 5.258,81.94 h1.52
PresAmp: Top Overlay "TOL" at 119.227,6.477 h1.27 r90; Top Overlay "VAL" at 119.227,6.477 h1.27 r90; Top Overlay "DEV" at 119.227,6.477 h1.27 r90; Top Overlay "PN" at 119.227,6.477 h1.27 r90; Top Overlay "*" at 115.621,3.861 h1.27 r90; Dimensions "RefDes2" at 119.227,6.477 h1.27 r90; Dimensions "*" at 115.621,3.861 h1.27 r90
R_Voltdiv_1: Top Overlay "TOL" at 107.721,61.696 h1.27 r90; Top Overlay "VAL" at 107.721,61.696 h1.27 r90; Top Overlay "DEV" at 107.721,61.696 h1.27 r90; Top Overlay "PN" at 107.721,61.696 h1.27 r90; Top Overlay "DEV" at 107.721,61.696 h1.27 r90; Top Overlay "RefDes" at 107.721,61.696 h1.27 r90
R_Voltdiv_2: Top Overlay "TOL" at 90.424,61.696 h1.27 r90; Top Overlay "VAL" at 90.424,61.696 h1.27 r90; Top Overlay "DEV" at 90.424,61.696 h1.27 r90; Top Overlay "PN" at 90.424,61.696 h1.27 r90; Top Overlay "DEV" at 90.424,61.696 h1.27 r90; Top Overlay "RefDes" at 90.424,61.696 h1.27 r90